# Altium PCB PCB4.PcbDoc
Units mil, origin at the board's own origin, x right, y up, seen from the top; angles counter-clockwise.
Board outline 1590.07 x 1440.14 mil, 2 copper layers (Top Layer, Bottom Layer); 13 components, 10 nets, 26 pads, 0 vias.
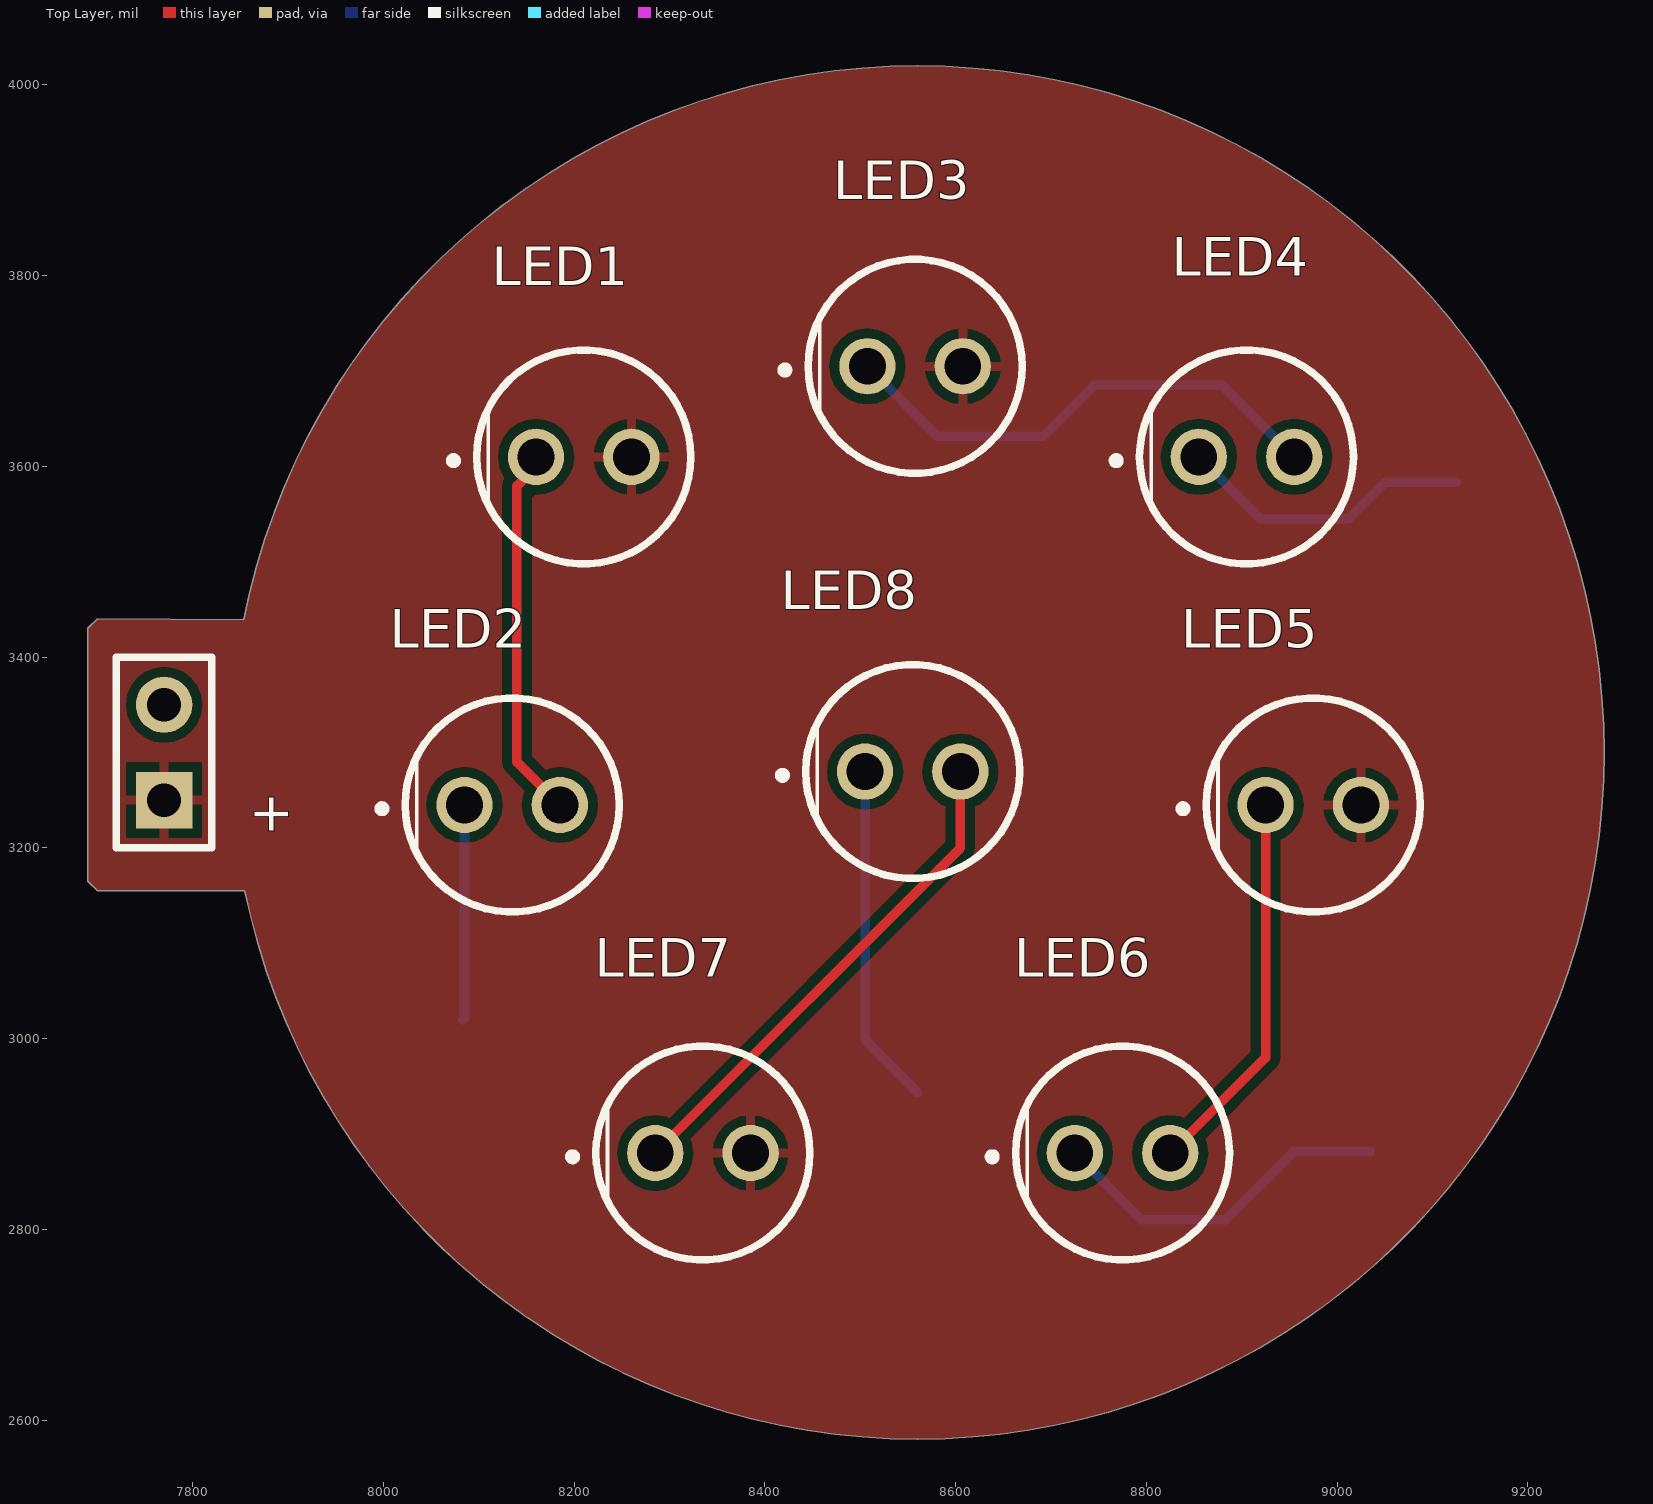
[diagram p0: Top Layer view]
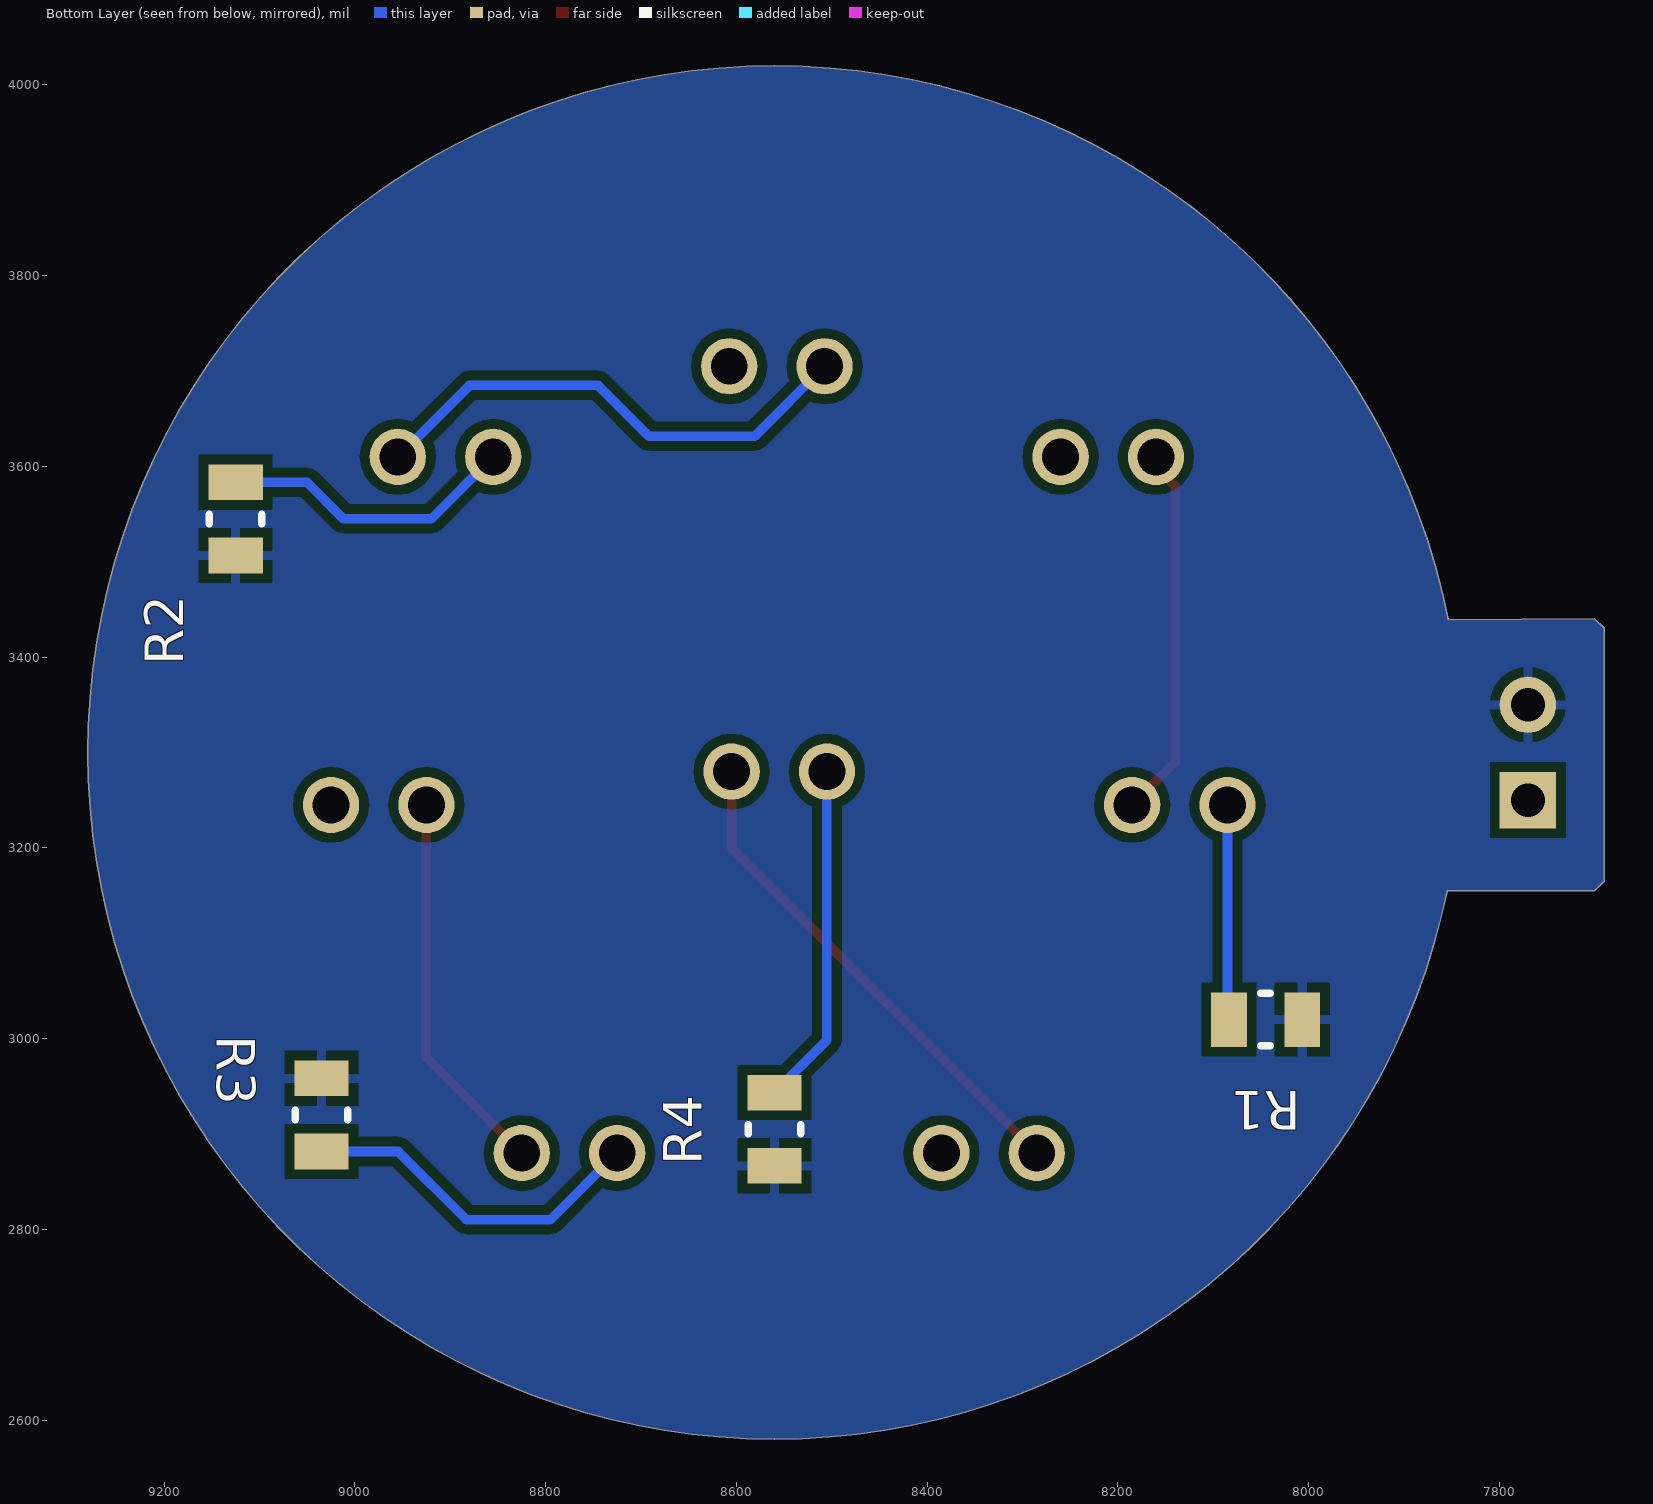
[diagram p1: Bottom Layer view, seen from below]
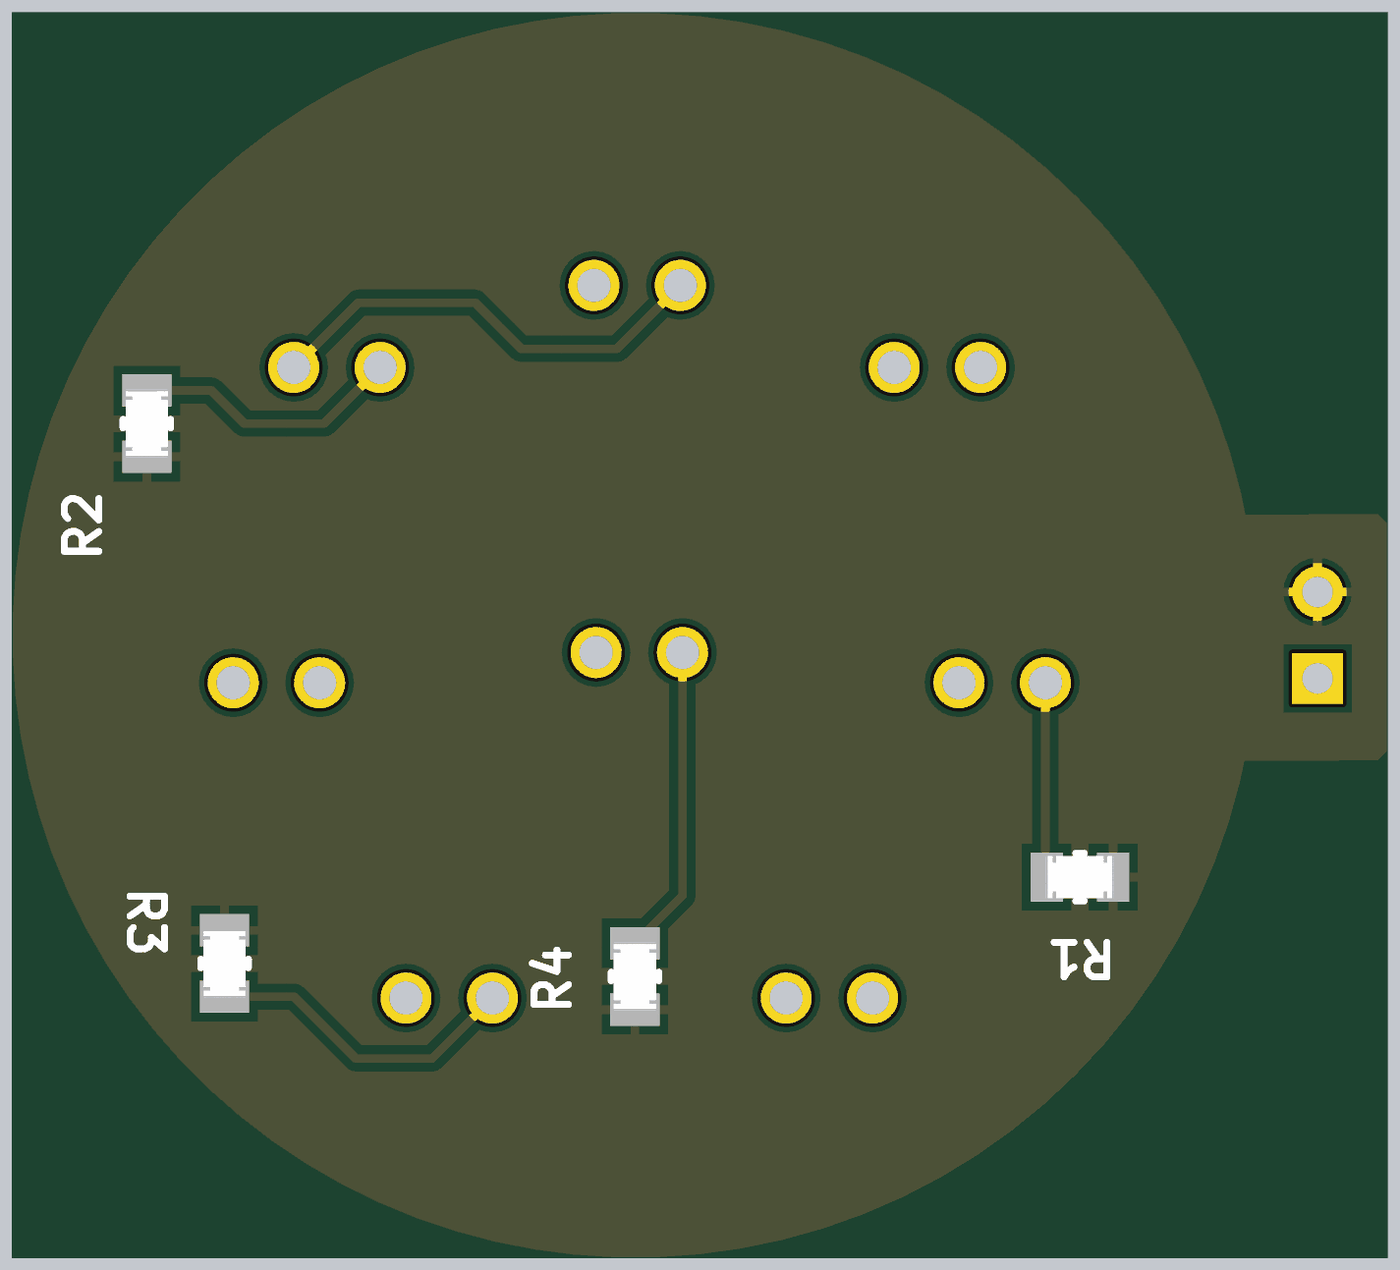
[diagram p2: 3D render of the assembled board from below, using the file's embedded part models]

## Layer stack, top to bottom
Top Solder: solder mask 0.4, Solder Resist, Dk 3.5
Top Layer: signal copper 1.4
Dielectric 1: dielectric 12.6, FR-4, Dk 4.8
Bottom Layer: signal copper 1.4
Bottom Solder: solder mask 0.4, Solder Resist, Dk 3.5

## Board outline
7700,3440.3 7690,3430.3 7690,3430 7690,3165 7700,3155.09 7854.71,3154.88 ccw(c8560,3300) 8560,2579.93 ccw(c8560,3300) 9280.07,3300 ccw(c8560,3300) 8560,4020.07 ccw(c8560,3300) 7853.57,3439.46

## Design rules (kind name [scope] priority, off if disabled: settings)
Clearance [All] p1: gap=10 ignorepadtopadclearanceinfootprint=FALSE except(0: Arc-Hole Track-Hole SMDPad-Hole THPad-Hole Via-Hole Fill-Hole Poly-Hole Region-Hole Text-Hole)
PolygonConnect [All] p1: connectstyle=Relief reliefconductorwidth=10 reliefentries=4 polygonreliefangle="90 Angle" airgapwidth=10
RoutingVias [All] p1: holewidth=28 width=50 viastyle="Through Hole" minholewidth=28 minwidth=50 maxholewidth=28 maxwidth=50
SolderMaskExpansion [All] p1: expansion=4 istentingtop=FALSE
Width [All] p1: maxlimit=10 minlimit=10 preferedwidth=10
30 further rules are at their usual default settings.

## Components (designator, comment, footprint, x,y, rotation, side; value= is the part's Value field where it differs from the comment)
+ "Header 2" HDR1X2 7770,3250 r90 top (schematic designator P1)
LED1 "WP7083ZGD_G" L53ND 8160,3610 r0 top
LED2 "WP7083ZGD_G" L53ND 8085,3245 r0 top
LED3 "WP7083ZGD_G" L53ND 8507.5,3705 r0 top
LED4 "WP7083ZGD_G" L53ND 8855,3610 r0 top
LED5 "WP7083ZGD_G" L53ND 8925,3245 r0 top
LED6 "WP7083ZGD_G" L53ND 8725,2880 r0 top
LED7 "WP7083ZGD_G" L53ND 8285,2880 r0 top
LED8 "WP7083ZGD_G" L53ND 8505,3280 r0 top
R1 "CRCW0805280RFKEA" FP-CRCW0805-e3-MFG 8045,3020 r0 bottom
R2 "CRCW0805280RFKEA" FP-CRCW0805-e3-MFG 9125,3545 r90 bottom
R3 "CRCW0805280RFKEA" FP-CRCW0805-e3-MFG 9035,2920 r270 bottom
R4 "CRCW0805280RFKEA" FP-CRCW0805-e3-MFG 8560,2905 r90 bottom

## Footprints (in the part's own frame and the unit in brackets; to place one, negate y for a bottom-side part, rotate by r counter-clockwise, add the part's x,y. Pads: shape width x height; smd on the part's side, far side on the other; paste and mask are expansions set on the pad)
FP-CRCW0805-e3-MFG [mm]
  rect 0.95x1.45 smd paste+0 mask+0: 1(-0.975,0) 2(0.975,0)
  silkscreen extent -0.13,-0.7 0.13,0.7, body extent -1,-0.63 1,0.62, height 0.5
HDR1X2 [mm] "Connector; Header; 2 Position"
  rect 1.5x1.5 hole 0.9: 1(0,0)
  round 1.5 hole 0.9: 2(2.54,0)
  silkscreen extent -1.27,-1.27 3.81,1.27
L53ND [mm]
  round 1.5 hole 0.98: 1(0,0) 2(2.54,0)
  silkscreen extent -2.3,-2.85 4.12,2.85

## Part data
+: "Header, 2-Pin", LatestRevisionDate=17-Jul-2002, LatestRevisionNote="Re-released for DXP Platform.", Publisher="Altium Limited"
LED1 LED2 LED3 LED4 LED5 LED6 LED7 LED8: "LED", Manufacturer_Name=Kingbright, Manufacturer_Part_Number=WP7083ZGD/G, Mouser Part Number=604-WP7083ZGD/G, Datasheet Link=http://www.kingbrightusa.com/images/catalog/SPEC/WP7083ZGD-G.pdf, Height=8.85mm, Mouser Price/Stock=https://www.mouser.co.uk/ProductDetail/Kingbright/WP7083ZGD-G?qs=vEWui5pQpauzaZd%252BFRBkgQ%3D%3D
R1 R2 R3 R4: library part CMP-2001-03748-2, "RES Thick Film, 280Ω, 1%, 0.125W, 100ppm/°C, 0805", Case Code (Imperial)=0805, Case Code (Metric)=2012, Max Operating Temperature=155°C, Max Power Dissipation=125mW, Min Operating Temperature=-55°C, Package Quantity=10, Resistance=280R, Temperature Coefficient=100ppm/°C, Tolerance=1%, Voltage Rating=150V, Case/Package=0805, Composition="Thick Film", Contact Plating=Tin, Depth=1.25mm, Features="Automotive AEC-Q200", Height=0.02inch, Lead Free="Lead Free", Length=2mm, Military Standard=Not, Number of Terminations=2, Packaging="Tape and Reel", Power Rating=125mW, Radiation Hardening=No, Termination=SMD/SMT, Voltage Rating (DC)=150V, Weight=0.000194oz, Width=1.25mm

## Nets (pads, with @x,y where several pads share a name; then routed paths per layer and width w, separated by ;. In a path a pad name is that pad's centre, name@x,y a point inside that pad or via, vN(x,y) a via of type N, cw(c..) or ccw(c..) an arc to the next point about the centre after c; other vN are vias at no path point)
12V: +.1 LED1.2 LED3.2 LED5.2 LED7.2
GND: +.2 R1.1 R2.1 R3.1 R4.1
NetLED1_1: LED1.1 LED2.2 | length 391.9
  Top Layer w10: LED1.1 8160,3599.61 8140,3579.61 8140,3290 LED2.2
NetLED2_1: LED2.1 R1.2 | length 225.7
  Bottom Layer w10: R1.2 8085,3021.61 LED2.1
NetLED3_1: LED3.1 LED4.2 | length 531.1
  Bottom Layer w10: LED3.1 8580.96,3631.54 8691.54,3631.54 8745,3685 8880,3685 LED4.2
NetLED4_1: LED4.1 R2.2 | length 312.8
  Bottom Layer w10: LED4.1 8920,3545 9012,3545 9050.39,3583.39 R2.2
NetLED5_1: LED5.1 LED6.2 | length 406.4
  Top Layer w10: LED6.2 8925,2980 LED5.1
NetLED6_1: LED6.1 R3.2 | length 368.7
  Bottom Layer w10: LED6.1 8795,2810 8883,2810 8954.61,2881.61 R3.2
NetLED7_1: LED7.1 LED8.2 | length 532.5
  Top Layer w10: LED7.1 8605,3200 LED8.2
NetLED8_1: LED8.1 R4.2 | length 359.4
  Bottom Layer w10: LED8.1 8505,2998.39 R4.2

## Polygon pours and split planes (outlines as drawn)
12V on Top Layer "12V_L01_P000" (solid, pour order 0): 7700,3440.3 7690,3430.3 7690,3430 7690,3165 7700,3155.09 7854.71,3154.88 ccw(c8560,3300) 8560,2579.93 ccw(c8560,3300) 9280.07,3300 ccw(c8560,3300) 8560,4020.07 ccw(c8560,3300) 7853.57,3439.46
GND on Bottom Layer "GND_L02_P001" (solid, pour order 1): 7700,3440.3 7690,3430.3 7690,3430 7690,3165 7700,3155.09 7854.71,3154.88 ccw(c8560,3300) 8560,2579.93 ccw(c8560,3300) 9280.07,3300 ccw(c8560,3300) 8560,4020.07 ccw(c8560,3300) 7853.57,3439.46